# Altium PCB MCU_FOR_DOWNLOAD_V6_8_ROW_PCS.PcbDoc (part 2 of 4)
Units mil, origin at the board's own origin, x right, y up, seen from the top; angles counter-clockwise.
Board outline 2364.06 x 7042.09 mil, 4 copper layers (Top, GND1, GND2, Bottom), stack 35.4 mil thick; 280 components, 38 nets, 1144 pads, 944 vias.
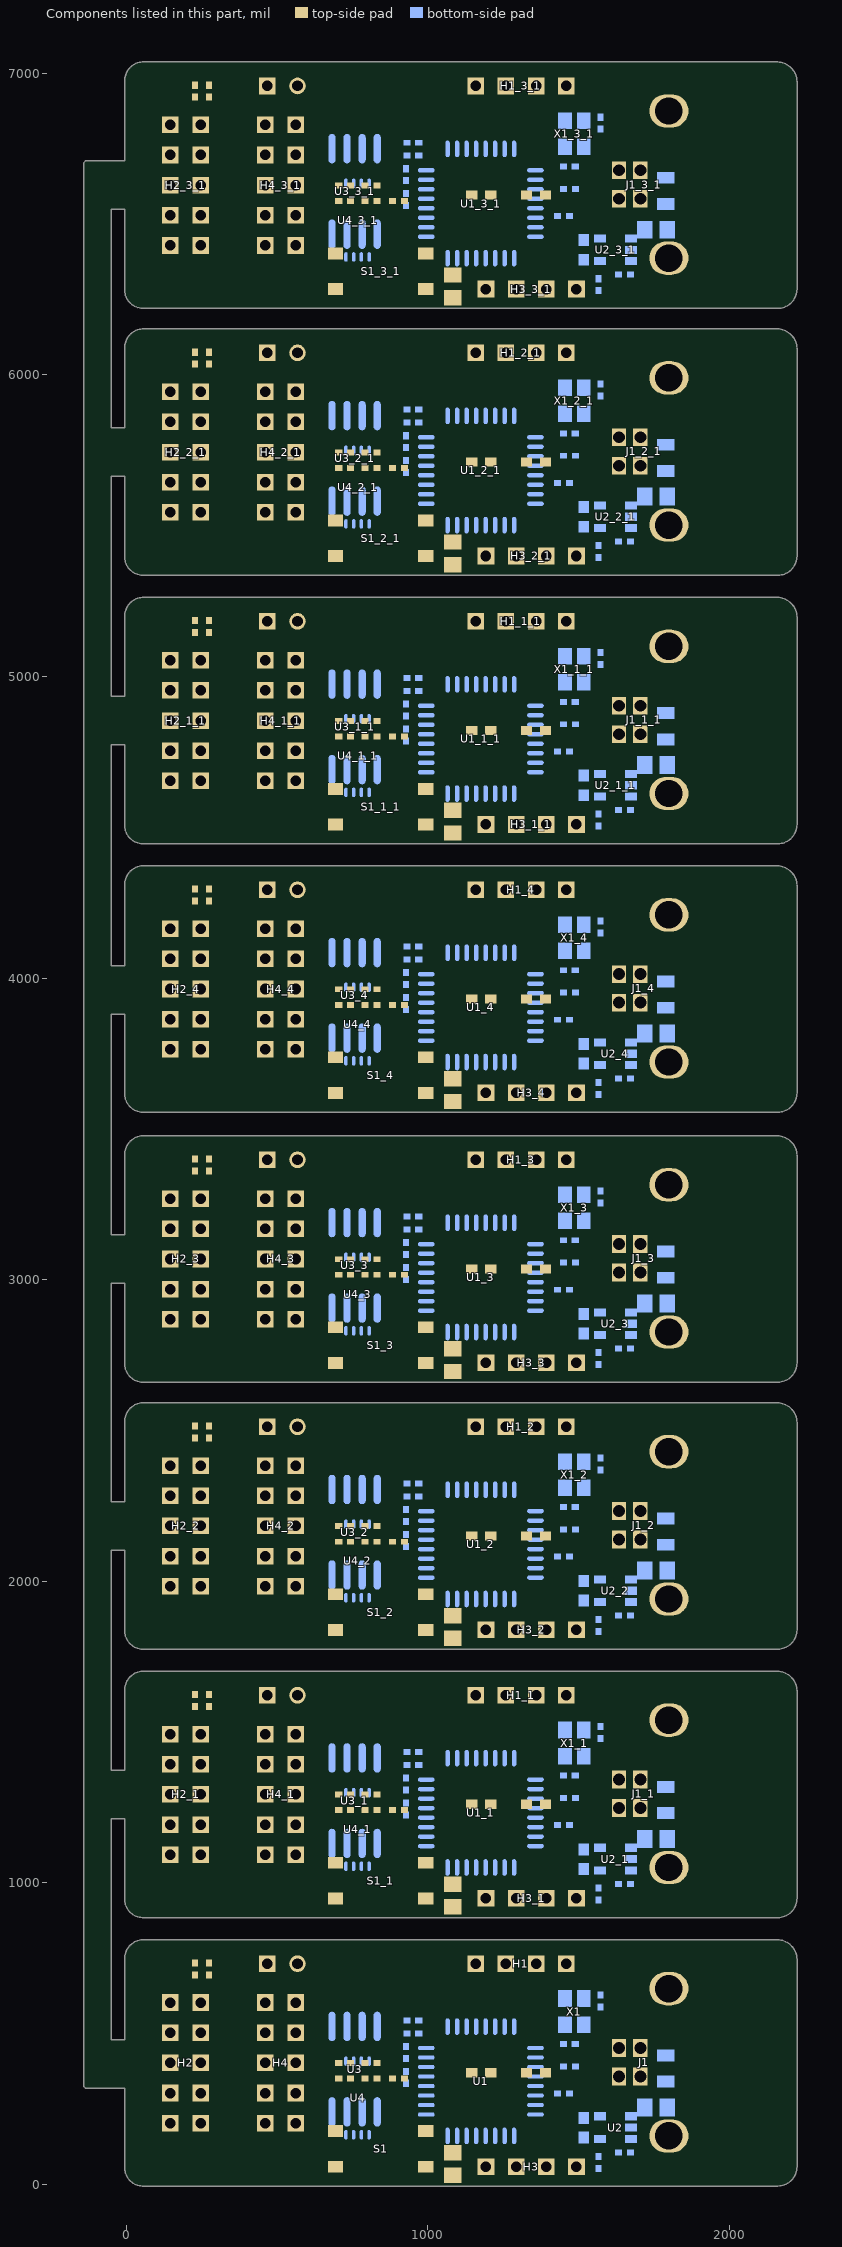
[diagram p2: the components of this part, seen from the top]

## Via types
v1: diameter 16/16/16/16 (per signal layer), hole 8, Top to Bottom, 936 vias
v2: diameter 55/55/55/55 (per signal layer), hole 37, Top to Bottom, 8 vias

## Nets (pads, with @x,y where several pads share a name; then routed paths per layer and width w, separated by ;. In a path a pad name is that pad's centre, name@x,y a point inside that pad or via, vN(x,y) a via of type N, cw(c..) or ccw(c..) an arc to the next point about the centre after c; other vN are vias at no path point) (continued)
copper on no net: | length 208596.2
  Top w7.87: v1(41.34,1641.97) 79.53,1680.16 644.09,1680.16 648.03,1676.22 v1(648.03,1673.07) ; v1(41.34,2531.97) 79.53,2570.16 644.09,2570.16 648.03,2566.22 v1(648.03,2563.07) ; v1(41.34,3416.97) 79.53,3455.16 644.09,3455.16 648.03,3451.22 v1(648.03,3448.07) ; v1(41.34,4311.97) 79.53,4350.16 644.09,4350.16 648.03,4346.22 v1(648.03,4343.07) ; v1(41.34,5201.97) 79.53,5240.16 644.09,5240.16 648.03,5236.22 v1(648.03,5233.07) ; v1(41.34,6091.97) 79.53,6130.16 644.09,6130.16 648.03,6126.22 v1(648.03,6123.07) ; v1(41.34,6976.97) 79.53,7015.16 644.09,7015.16 648.03,7011.22 v1(648.03,7008.07) ; 67.32,1585.28 69.69,1585.28 ; 67.32,2475.28 69.69,2475.28 ; 67.32,3360.28 69.69,3360.28 ; 67.32,4255.28 69.69,4255.28 ; 67.32,5145.28 69.69,5145.28 ; 67.32,6035.28 69.69,6035.28 ; 67.32,6920.28 69.69,6920.28 ; 146.85,1093.54 194.88,1141.57 329.92,1141.57 422.44,1049.06 594.49,1049.06 656.3,1110.87 1048.03,1110.87 v1(1074.41,1084.49) ; 146.85,1193.54 146.85,1194.72 192.52,1240.39 322.34,1240.39 409.45,1153.29 605.02,1153.29 617.32,1140.98 1081.69,1140.98 v1(1127.95,1094.72) ; 146.85,1493.54 149.2,1493.54 203.54,1439.2 203.54,1437.24 292.52,1437.24 314.57,1415.2 314.57,1344.33 425.59,1233.31 597.05,1233.31 674.8,1155.55 1155.71,1155.55 v1(1222.44,1088.82) ; 146.85,1983.54 194.88,2031.57 329.92,2031.57 422.44,1939.06 594.49,1939.06 656.3,2000.87 1048.03,2000.87 v1(1074.41,1974.49) ; 146.85,2083.54 146.85,2084.72 192.52,2130.39 322.34,2130.39 409.45,2043.29 605.02,2043.29 617.32,2030.98 1081.69,2030.98 v1(1127.95,1984.72) ; 146.85,2383.54 149.2,2383.54 203.54,2329.2 203.54,2327.24 292.52,2327.24 314.57,2305.2 314.57,2234.33 425.59,2123.31 597.05,2123.31 674.8,2045.55 1155.71,2045.55 v1(1222.44,1978.82) ; 146.85,2868.54 194.88,2916.57 329.92,2916.57 422.44,2824.06 594.49,2824.06 656.3,2885.87 1048.03,2885.87 v1(1074.41,2859.49) ; 146.85,2968.54 146.85,2969.72 192.52,3015.39 322.34,3015.39 409.45,2928.29 605.02,2928.29 617.32,2915.98 1081.69,2915.98 v1(1127.95,2869.72) ; 146.85,3268.54 149.2,3268.54 203.54,3214.2 203.54,3212.24 292.52,3212.24 314.57,3190.2 314.57,3119.33 425.59,3008.31 597.05,3008.31 674.8,2930.55 1155.71,2930.55 v1(1222.44,2863.82) ; 146.85,3763.54 194.88,3811.57 329.92,3811.57 422.44,3719.06 594.49,3719.06 656.3,3780.87 1048.03,3780.87 v1(1074.41,3754.49) ; 146.85,3863.54 146.85,3864.72 192.52,3910.39 322.34,3910.39 409.45,3823.29 605.02,3823.29 617.32,3810.98 1081.69,3810.98 v1(1127.95,3764.72) ; 146.85,4163.54 149.2,4163.54 203.54,4109.2 203.54,4107.24 292.52,4107.24 314.57,4085.2 314.57,4014.33 425.59,3903.31 597.05,3903.31 674.8,3825.55 1155.71,3825.55 v1(1222.44,3758.82) ; 146.85,4653.54 194.88,4701.57 329.92,4701.57 422.44,4609.06 594.49,4609.06 656.3,4670.87 1048.03,4670.87 v1(1074.41,4644.49) ; 146.85,4753.54 146.85,4754.72 192.52,4800.39 322.34,4800.39 409.45,4713.29 605.02,4713.29 617.32,4700.98 1081.69,4700.98 v1(1127.95,4654.72) ; 146.85,5053.54 149.2,5053.54 203.54,4999.2 203.54,4997.24 292.52,4997.24 314.57,4975.2 314.57,4904.33 425.59,4793.31 597.05,4793.31 674.8,4715.55 1155.71,4715.55 v1(1222.44,4648.82) ; 146.85,5543.54 194.88,5591.57 329.92,5591.57 422.44,5499.06 594.49,5499.06 656.3,5560.87 1048.03,5560.87 v1(1074.41,5534.49) ; 146.85,5643.54 146.85,5644.72 192.52,5690.39 322.34,5690.39 409.45,5603.29 605.02,5603.29 617.32,5590.98 1081.69,5590.98 v1(1127.95,5544.72) ; 146.85,5943.54 149.2,5943.54 203.54,5889.2 203.54,5887.24 292.52,5887.24 314.57,5865.2 314.57,5794.33 425.59,5683.31 597.05,5683.31 674.8,5605.55 1155.71,5605.55 v1(1222.44,5538.82) ; 146.85,6428.54 194.88,6476.57 329.92,6476.57 422.44,6384.06 594.49,6384.06 656.3,6445.87 1048.03,6445.87 v1(1074.41,6419.49) ; 146.85,6528.54 146.85,6529.72 192.52,6575.39 322.34,6575.39 409.45,6488.29 605.02,6488.29 617.32,6475.98 1081.69,6475.98 v1(1127.95,6429.72) ; 146.85,6828.54 149.2,6828.54 203.54,6774.2 203.54,6772.24 292.52,6772.24 314.57,6750.2 314.57,6679.33 425.59,6568.31 597.05,6568.31 674.8,6490.55 1155.71,6490.55 v1(1222.44,6423.82) ; v1(196.85,1054.96) 202.76,1054.96 238.58,1019.13 622.83,1019.13 v1@648.83,1045.13 ; v1(196.85,1944.96) 202.76,1944.96 238.58,1909.13 622.83,1909.13 v1@648.83,1935.13 ; v1(196.85,2829.96) 202.76,2829.96 238.58,2794.13 622.83,2794.13 v1@648.83,2820.13 ; v1(196.85,3724.96) 202.76,3724.96 238.58,3689.13 622.83,3689.13 v1@648.83,3715.13 ; v1(196.85,4614.96) 202.76,4614.96 238.58,4579.13 622.83,4579.13 v1@648.83,4605.13 ; v1(196.85,5504.96) 202.76,5504.96 238.58,5469.13 622.83,5469.13 v1@648.83,5495.13 ; v1(196.85,6389.96) 202.76,6389.96 238.58,6354.13 622.83,6354.13 v1@648.83,6380.13 ; 227.95,1624.65 274.02,1624.65 251.18,1601.81 251.18,1501.02 246.85,1496.69 246.85,1493.54 ; 227.95,2514.65 274.02,2514.65 251.18,2491.81 251.18,2391.02 246.85,2386.69 246.85,2383.54 ; 227.95,3399.65 274.02,3399.65 251.18,3376.81 251.18,3276.02 246.85,3271.69 246.85,3268.54 ; 227.95,4294.65 274.02,4294.65 251.18,4271.81 251.18,4171.02 246.85,4166.69 246.85,4163.54 ; 227.95,5184.65 274.02,5184.65 251.18,5161.81 251.18,5061.02 246.85,5056.69 246.85,5053.54 ; 227.95,6074.65 274.02,6074.65 251.18,6051.81 251.18,5951.02 246.85,5946.69 246.85,5943.54 ; 227.95,6959.65 274.02,6959.65 251.18,6936.81 251.18,6836.02 246.85,6831.69 246.85,6828.54 ; 246.85,1093.54 251.68,1093.54 255.02,1090.2 257.58,1090.2 314.17,1033.6 600.39,1033.6 663.78,1096.99 1025.89,1096.99 1059.65,1063.23 1135.33,1063.23 1156.59,1084.49 1156.99,1084.49 1156.99,1088.33 v1(1159.45,1090.79) ; 246.85,1193.54 327.17,1193.54 327.36,1193.74 385.83,1135.28 599.21,1135.28 609.06,1125.43 1063.78,1125.43 v1(1096.46,1092.76) ; 246.85,1983.54 251.68,1983.54 255.02,1980.2 257.58,1980.2 314.17,1923.6 600.39,1923.6 663.78,1986.99 1025.89,1986.99 1059.65,1953.23 1135.33,1953.23 1156.59,1974.49 1156.99,1974.49 1156.99,1978.33 v1(1159.45,1980.79) ; 246.85,2083.54 327.17,2083.54 327.36,2083.74 385.83,2025.28 599.21,2025.28 609.06,2015.43 1063.78,2015.43 v1(1096.46,1982.76) ; 246.85,2868.54 251.68,2868.54 255.02,2865.2 257.58,2865.2 314.17,2808.6 600.39,2808.6 663.78,2871.99 1025.89,2871.99 1059.65,2838.23 1135.33,2838.23 1156.59,2859.49 1156.99,2859.49 1156.99,2863.33 v1(1159.45,2865.79) ; 246.85,2968.54 327.17,2968.54 327.36,2968.74 385.83,2910.28 599.21,2910.28 609.06,2900.43 1063.78,2900.43 v1(1096.46,2867.76) ; 246.85,3763.54 251.68,3763.54 255.02,3760.2 257.58,3760.2 314.17,3703.6 600.39,3703.6 663.78,3766.99 1025.89,3766.99 1059.65,3733.23 1135.33,3733.23 1156.59,3754.49 1156.99,3754.49 1156.99,3758.33 v1(1159.45,3760.79) ; 246.85,3863.54 327.17,3863.54 327.36,3863.74 385.83,3805.28 599.21,3805.28 609.06,3795.43 1063.78,3795.43 v1(1096.46,3762.76) ; 246.85,4653.54 251.68,4653.54 255.02,4650.2 257.58,4650.2 314.17,4593.6 600.39,4593.6 663.78,4656.99 1025.89,4656.99 1059.65,4623.23 1135.33,4623.23 1156.59,4644.49 1156.99,4644.49 1156.99,4648.33 v1(1159.45,4650.79) ; 246.85,4753.54 327.17,4753.54 327.36,4753.74 385.83,4695.28 599.21,4695.28 609.06,4685.43 1063.78,4685.43 v1(1096.46,4652.76) ; 246.85,5543.54 251.68,5543.54 255.02,5540.2 257.58,5540.2 314.17,5483.6 600.39,5483.6 663.78,5546.99 1025.89,5546.99 1059.65,5513.23 1135.33,5513.23 1156.59,5534.49 1156.99,5534.49 1156.99,5538.33 v1(1159.45,5540.79) ; 246.85,5643.54 327.17,5643.54 327.36,5643.74 385.83,5585.28 599.21,5585.28 609.06,5575.43 1063.78,5575.43 v1(1096.46,5542.76) ; 246.85,6428.54 251.68,6428.54 255.02,6425.2 257.58,6425.2 314.17,6368.6 600.39,6368.6 663.78,6431.99 1025.89,6431.99 1059.65,6398.23 1135.33,6398.23 1156.59,6419.49 1156.99,6419.49 1156.99,6423.33 v1(1159.45,6425.79) ; 246.85,6528.54 327.17,6528.54 327.36,6528.74 385.83,6470.28 599.21,6470.28 609.06,6460.43 1063.78,6460.43 v1(1096.46,6427.76) ; 274.02,1585.28 316.14,1585.28 381.89,1519.53 381.89,1374.25 411.42,1344.72 v1(600.39,1344.72) 701.97,1243.15 701.97,1241.18 701.97,1232.52 706.5,1227.99 ; 274.02,2475.28 316.14,2475.28 381.89,2409.53 381.89,2264.25 411.42,2234.72 v1(600.39,2234.72) 701.97,2133.15 701.97,2131.18 701.97,2122.52 706.5,2117.99 ; 274.02,3360.28 316.14,3360.28 381.89,3294.53 381.89,3149.25 411.42,3119.72 v1(600.39,3119.72) 701.97,3018.15 701.97,3016.18 701.97,3007.52 706.5,3002.99 ; 274.02,4255.28 316.14,4255.28 381.89,4189.53 381.89,4044.25 411.42,4014.72 v1(600.39,4014.72) 701.97,3913.15 701.97,3911.18 701.97,3902.52 706.5,3897.99 ; 274.02,5145.28 316.14,5145.28 381.89,5079.53 381.89,4934.25 411.42,4904.72 v1(600.39,4904.72) 701.97,4803.15 701.97,4801.18 701.97,4792.52 706.5,4787.99 ; 274.02,6035.28 316.14,6035.28 381.89,5969.53 381.89,5824.25 411.42,5794.72 v1(600.39,5794.72) 701.97,5693.15 701.97,5691.18 701.97,5682.52 706.5,5677.99 ; 274.02,6920.28 316.14,6920.28 381.89,6854.53 381.89,6709.25 411.42,6679.72 v1(600.39,6679.72) 701.97,6578.15 701.97,6576.18 701.97,6567.52 706.5,6562.99 ; 461.81,1493.54 460.63,1493.54 458.27,1491.18 458.86,1490.59 497.24,1452.2 759.45,1452.2 826.77,1384.88 869.29,1384.88 v1(872.05,1382.13) ; 461.81,2383.54 460.63,2383.54 458.27,2381.18 458.86,2380.59 497.24,2342.2 759.45,2342.2 826.77,2274.88 869.29,2274.88 v1(872.05,2272.13) ; 461.81,3268.54 460.63,3268.54 458.27,3266.18 458.86,3265.59 497.24,3227.2 759.45,3227.2 826.77,3159.88 869.29,3159.88 v1(872.05,3157.13) ; 461.81,4163.54 460.63,4163.54 458.27,4161.18 458.86,4160.59 497.24,4122.2 759.45,4122.2 826.77,4054.88 869.29,4054.88 v1(872.05,4052.13) ; 461.81,5053.54 460.63,5053.54 458.27,5051.18 458.86,5050.59 497.24,5012.2 759.45,5012.2 826.77,4944.88 869.29,4944.88 v1(872.05,4942.13) ; 461.81,5943.54 460.63,5943.54 458.27,5941.18 458.86,5940.59 497.24,5902.2 759.45,5902.2 826.77,5834.88 869.29,5834.88 v1(872.05,5832.13) ; 461.81,6828.54 460.63,6828.54 458.27,6826.18 458.86,6825.59 497.24,6787.2 759.45,6787.2 826.77,6719.88 869.29,6719.88 v1(872.05,6717.13) ; v1(692.91,1187.24) 693.31,1187.24 710.63,1169.92 1176.77,1169.92 v1(1185.04,1161.65) ; v1(692.91,1360.47) v1(1149.61,1360.47) ; v1(692.91,2077.24) 693.31,2077.24 710.63,2059.92 1176.77,2059.92 v1(1185.04,2051.65) ; v1(692.91,2250.47) v1(1149.61,2250.47) ; v1(692.91,2962.24) 693.31,2962.24 710.63,2944.92 1176.77,2944.92 v1(1185.04,2936.65) ; v1(692.91,3135.47) v1(1149.61,3135.47) ; v1(692.91,3857.24) 693.31,3857.24 710.63,3839.92 1176.77,3839.92 v1(1185.04,3831.65) ; v1(692.91,4030.47) v1(1149.61,4030.47) ; v1(692.91,4747.24) 693.31,4747.24 710.63,4729.92 1176.77,4729.92 v1(1185.04,4721.65) ; v1(692.91,4920.47) v1(1149.61,4920.47) ; v1(692.91,5637.24) 693.31,5637.24 710.63,5619.92 1176.77,5619.92 v1(1185.04,5611.65) ; v1(692.91,5810.47) v1(1149.61,5810.47) ; v1(692.91,6522.24) 693.31,6522.24 710.63,6504.92 1176.77,6504.92 v1(1185.04,6496.65) ; v1(692.91,6695.47) v1(1149.61,6695.47) ; 704.72,1241.18 706.5,1239.41 706.5,1227.99 ; 704.72,1292.76 704.72,1320.31 725.2,1340.79 874.8,1340.79 ; 704.72,2131.18 706.5,2129.41 706.5,2117.99 ; 704.72,2182.76 704.72,2210.31 725.2,2230.79 874.8,2230.79 ; 704.72,3016.18 706.5,3014.41 706.5,3002.99 ; 704.72,3067.76 704.72,3095.31 725.2,3115.79 874.8,3115.79 ; 704.72,3911.18 706.5,3909.41 706.5,3897.99 ; 704.72,3962.76 704.72,3990.31 725.2,4010.79 874.8,4010.79 ; 704.72,4801.18 706.5,4799.41 706.5,4787.99 ; 704.72,4852.76 704.72,4880.31 725.2,4900.79 874.8,4900.79 ; 704.72,5691.18 706.5,5689.41 706.5,5677.99 ; 704.72,5742.76 704.72,5770.31 725.2,5790.79 874.8,5790.79 ; 704.72,6576.18 706.5,6574.41 706.5,6562.99 ; 704.72,6627.76 704.72,6655.31 725.2,6675.79 874.8,6675.79 ; 744.09,1241.18 744.09,1292.76 744.09,1313.62 751.18,1320.71 753.54,1320.71 v1(753.94,1321.1) ; 744.09,2131.18 744.09,2182.76 744.09,2203.62 751.18,2210.71 753.54,2210.71 v1(753.94,2211.1) ; 744.09,3016.18 744.09,3067.76 744.09,3088.62 751.18,3095.71 753.54,3095.71 v1(753.94,3096.1) ; 744.09,3911.18 744.09,3962.76 744.09,3983.62 751.18,3990.71 753.54,3990.71 v1(753.94,3991.1) ; 744.09,4801.18 744.09,4852.76 744.09,4873.62 751.18,4880.71 753.54,4880.71 v1(753.94,4881.1) ; 744.09,5691.18 744.09,5742.76 744.09,5763.62 751.18,5770.71 753.54,5770.71 v1(753.94,5771.1) ; 744.09,6576.18 744.09,6627.76 744.09,6648.62 751.18,6655.71 753.54,6655.71 v1(753.94,6656.1) ; v1(783.46,1321.1) 803.15,1321.1 831.5,1292.76 ; v1(783.46,2211.1) 803.15,2211.1 831.5,2182.76 ; v1(783.46,3096.1) 803.15,3096.1 831.5,3067.76 ; v1(783.46,3991.1) 803.15,3991.1 831.5,3962.76 ; v1(783.46,4881.1) 803.15,4881.1 831.5,4852.76 ; v1(783.46,5771.1) 803.15,5771.1 831.5,5742.76 ; v1(783.46,6656.1) 803.15,6656.1 831.5,6627.76 ; v1(791.34,1210.87) 795.67,1206.54 795.67,1206.34 1225.2,1206.34 1261.42,1242.56 1261.42,1295.12 v1(1309.06,1342.76) ; v1(791.34,2100.87) 795.67,2096.54 795.67,2096.34 1225.2,2096.34 1261.42,2132.56 1261.42,2185.12 v1(1309.06,2232.76) ; v1(791.34,2985.87) 795.67,2981.54 795.67,2981.34 1225.2,2981.34 1261.42,3017.56 1261.42,3070.12 v1(1309.06,3117.76) ; v1(791.34,3880.87) 795.67,3876.54 795.67,3876.34 1225.2,3876.34 1261.42,3912.56 1261.42,3965.12 v1(1309.06,4012.76) ; v1(791.34,4770.87) 795.67,4766.54 795.67,4766.34 1225.2,4766.34 1261.42,4802.56 1261.42,4855.12 v1(1309.06,4902.76) ; v1(791.34,5660.87) 795.67,5656.54 795.67,5656.34 1225.2,5656.34 1261.42,5692.56 1261.42,5745.12 v1(1309.06,5792.76) ; v1(791.34,6545.87) 795.67,6541.54 795.67,6541.34 1225.2,6541.34 1261.42,6577.56 1261.42,6630.12 v1(1309.06,6677.76) ; 792.13,1241.18 792.13,1242.76 828.74,1279.37 828.74,1291.22 829.12,1291.59 829.12,1291.95 ; 792.13,1292.76 790.55,1292.76 767.5,1269.7 767.5,1240.79 767.13,1191.57 766.54,1188.43 ; 792.13,2131.18 792.13,2132.76 828.74,2169.37 828.74,2181.22 829.12,2181.59 829.12,2181.95 ; 792.13,2182.76 790.55,2182.76 767.5,2159.7 767.5,2130.79 767.13,2081.57 766.54,2078.43 ; 792.13,3016.18 792.13,3017.76 828.74,3054.37 828.74,3066.22 829.12,3066.59 829.12,3066.95 ; 792.13,3067.76 790.55,3067.76 767.5,3044.7 767.5,3015.79 767.13,2966.57 766.54,2963.43 ; 792.13,3911.18 792.13,3912.76 828.74,3949.37 828.74,3961.22 829.12,3961.59 829.12,3961.95 ; 792.13,3962.76 790.55,3962.76 767.5,3939.7 767.5,3910.79 767.13,3861.57 766.54,3858.43 ; 792.13,4801.18 792.13,4802.76 828.74,4839.37 828.74,4851.22 829.12,4851.59 829.12,4851.95 ; 792.13,4852.76 790.55,4852.76 767.5,4829.7 767.5,4800.79 767.13,4751.57 766.54,4748.43 ; 792.13,5691.18 792.13,5692.76 828.74,5729.37 828.74,5741.22 829.12,5741.59 829.12,5741.95 ; 792.13,5742.76 790.55,5742.76 767.5,5719.7 767.5,5690.79 767.13,5641.57 766.54,5638.43 ; 792.13,6576.18 792.13,6577.76 828.74,6614.37 828.74,6626.22 829.12,6626.59 829.12,6626.95 ; 792.13,6627.76 790.55,6627.76 767.5,6604.7 767.5,6575.79 767.13,6526.57 766.54,6523.43 ; 831.5,1241.18 832.28,1240.39 832.28,1238.03 838.39,1231.93 838.39,1230.75 v1(844.49,1224.65) ; 831.5,2131.18 832.28,2130.39 832.28,2128.03 838.39,2121.93 838.39,2120.75 v1(844.49,2114.65) ; 831.5,3016.18 832.28,3015.39 832.28,3013.03 838.39,3006.93 838.39,3005.75 v1(844.49,2999.65) ; 831.5,3911.18 832.28,3910.39 832.28,3908.03 838.39,3901.93 838.39,3900.75 v1(844.49,3894.65) ; 831.5,4801.18 832.28,4800.39 832.28,4798.03 838.39,4791.93 838.39,4790.75 v1(844.49,4784.65) ; 831.5,5691.18 832.28,5690.39 832.28,5688.03 838.39,5681.93 838.39,5680.75 v1(844.49,5674.65) ; 831.5,6576.18 832.28,6575.39 832.28,6573.03 838.39,6566.93 838.39,6565.75 v1(844.49,6559.65) ; 874.8,1241.57 874.8,1340.79 ; 874.8,2131.57 874.8,2230.79 ; 874.8,3016.57 874.8,3115.79 ; 874.8,3911.57 874.8,4010.79 ; 874.8,4801.57 874.8,4900.79 ; 874.8,5691.57 874.8,5790.79 ; 874.8,6576.57 874.8,6675.79 ; v1(893.7,1269.92) 922.44,1241.18 ; v1(893.7,2159.92) 922.44,2131.18 ; v1(893.7,3044.92) 922.44,3016.18 ; v1(893.7,3939.92) 922.44,3911.18 ; v1(893.7,4829.92) 922.44,4801.18 ; v1(893.7,5719.92) 922.44,5691.18 ; v1(893.7,6604.92) 922.44,6576.18 ; v1(944.88,1069.13) 991.34,1069.13 993.31,1067.17 ; v1(944.88,1959.13) 991.34,1959.13 993.31,1957.17 ; v1(944.88,2844.13) 991.34,2844.13 993.31,2842.17 ; v1(944.88,3739.13) 991.34,3739.13 993.31,3737.17 ; v1(944.88,4629.13) 991.34,4629.13 993.31,4627.17 ; v1(944.88,5519.13) 991.34,5519.13 993.31,5517.17 ; v1(944.88,6404.13) 991.34,6404.13 993.31,6402.17 ; v1(948.82,1265.98) 1143.31,1265.98 1146.17,1263.13 1146.17,1260.87 ; v1(948.82,2155.98) 1143.31,2155.98 1146.17,2153.13 1146.17,2150.87 ; v1(948.82,3040.98) 1143.31,3040.98 1146.17,3038.13 1146.17,3035.87 ; v1(948.82,3935.98) 1143.31,3935.98 1146.17,3933.13 1146.17,3930.87 ; v1(948.82,4825.98) 1143.31,4825.98 1146.17,4823.13 1146.17,4820.87 ; v1(948.82,5715.98) 1143.31,5715.98 1146.17,5713.13 1146.17,5710.87 ; v1(948.82,6600.98) 1143.31,6600.98 1146.17,6598.13 1146.17,6595.87 ; v1(1191.73,1378.98) 1192.52,1378.19 1192.52,1372.68 1160.63,1340.79 874.8,1340.79 ; v1(1191.73,2268.98) 1192.52,2268.19 1192.52,2262.68 1160.63,2230.79 874.8,2230.79 ; v1(1191.73,3153.98) 1192.52,3153.19 1192.52,3147.68 1160.63,3115.79 874.8,3115.79 ; v1(1191.73,4048.98) 1192.52,4048.19 1192.52,4042.68 1160.63,4010.79 874.8,4010.79 ; v1(1191.73,4938.98) 1192.52,4938.19 1192.52,4932.68 1160.63,4900.79 874.8,4900.79 ; v1(1191.73,5828.98) 1192.52,5828.19 1192.52,5822.68 1160.63,5790.79 874.8,5790.79 ; v1(1191.73,6713.98) 1192.52,6713.19 1192.52,6707.68 1160.63,6675.79 874.8,6675.79 ; v1(1222.44,1122.28) 1223.62,1123.46 1283.86,1123.46 1309.65,1097.68 1583.27,1097.68 1639.76,1041.18 1640.16,1041.57 v1(1702.76,1041.57) ; v1(1222.44,2012.28) 1223.62,2013.46 1283.86,2013.46 1309.65,1987.68 1583.27,1987.68 1639.76,1931.18 1640.16,1931.57 v1(1702.76,1931.57) ; v1(1222.44,2897.28) 1223.62,2898.46 1283.86,2898.46 1309.65,2872.68 1583.27,2872.68 1639.76,2816.18 1640.16,2816.57 v1(1702.76,2816.57) ; v1(1222.44,3792.28) 1223.62,3793.46 1283.86,3793.46 1309.65,3767.68 1583.27,3767.68 1639.76,3711.18 1640.16,3711.57 v1(1702.76,3711.57) ; v1(1222.44,4682.28) 1223.62,4683.46 1283.86,4683.46 1309.65,4657.68 1583.27,4657.68 1639.76,4601.18 1640.16,4601.57 v1(1702.76,4601.57) ; v1(1222.44,5572.28) 1223.62,5573.46 1283.86,5573.46 1309.65,5547.68 1583.27,5547.68 1639.76,5491.18 1640.16,5491.57 v1(1702.76,5491.57) ; v1(1222.44,6457.28) 1223.62,6458.46 1283.86,6458.46 1309.65,6432.68 1583.27,6432.68 1639.76,6376.18 1640.16,6376.57 v1(1702.76,6376.57) ; v1(1263.78,1096.69) 1263.39,1082.13 1218.9,1037.64 v1(944.88,1037.64) 660.24,1037.64 649.21,1044.89 v1@648.83,1045.13 ; v1(1263.78,1986.69) 1263.39,1972.13 1218.9,1927.64 v1(944.88,1927.64) 660.24,1927.64 649.21,1934.89 v1@648.83,1935.13 ; v1(1263.78,2871.69) 1263.39,2857.13 1218.9,2812.64 v1(944.88,2812.64) 660.24,2812.64 649.21,2819.89 v1@648.83,2820.13 ; v1(1263.78,3766.69) 1263.39,3752.13 1218.9,3707.64 v1(944.88,3707.64) 660.24,3707.64 649.21,3714.89 v1@648.83,3715.13 ; v1(1263.78,4656.69) 1263.39,4642.13 1218.9,4597.64 v1(944.88,4597.64) 660.24,4597.64 649.21,4604.89 v1@648.83,4605.13 ; v1(1263.78,5546.69) 1263.39,5532.13 1218.9,5487.64 v1(944.88,5487.64) 660.24,5487.64 649.21,5494.89 v1@648.83,5495.13 ; v1(1263.78,6431.69) 1263.39,6417.13 1218.9,6372.64 v1(944.88,6372.64) 660.24,6372.64 649.21,6379.89 v1@648.83,6380.13 ; v1(1311.02,1311.26) 1309.45,1312.83 1305.12,1312.83 1301.77,1309.49 1300.98,1309.49 1280.51,1289.02 1280.51,1216.57 1252.36,1188.43 766.54,1188.43 ; v1(1311.02,2201.26) 1309.45,2202.83 1305.12,2202.83 1301.77,2199.49 1300.98,2199.49 1280.51,2179.02 1280.51,2106.57 1252.36,2078.43 766.54,2078.43 ; v1(1311.02,3086.26) 1309.45,3087.83 1305.12,3087.83 1301.77,3084.49 1300.98,3084.49 1280.51,3064.02 1280.51,2991.57 1252.36,2963.43 766.54,2963.43 ; v1(1311.02,3981.26) 1309.45,3982.83 1305.12,3982.83 1301.77,3979.49 1300.98,3979.49 1280.51,3959.02 1280.51,3886.57 1252.36,3858.43 766.54,3858.43 ; v1(1311.02,4871.26) 1309.45,4872.83 1305.12,4872.83 1301.77,4869.49 1300.98,4869.49 1280.51,4849.02 1280.51,4776.57 1252.36,4748.43 766.54,4748.43 ; v1(1311.02,5761.26) 1309.45,5762.83 1305.12,5762.83 1301.77,5759.49 1300.98,5759.49 1280.51,5739.02 1280.51,5666.57 1252.36,5638.43 766.54,5638.43 ; v1(1311.02,6646.26) 1309.45,6647.83 1305.12,6647.83 1301.77,6644.49 1300.98,6644.49 1280.51,6624.02 1280.51,6551.57 1252.36,6523.43 766.54,6523.43 ; v1(1322.83,1286.06) 1327.27,1281.63 1327.27,1260.87 ; v1(1322.83,2176.06) 1327.27,2171.63 1327.27,2150.87 ; v1(1322.83,3061.06) 1327.27,3056.63 1327.27,3035.87 ; v1(1322.83,3956.06) 1327.27,3951.63 1327.27,3930.87 ; v1(1322.83,4846.06) 1327.27,4841.63 1327.27,4820.87 ; v1(1322.83,5736.06) 1327.27,5731.63 1327.27,5710.87 ; v1(1322.83,6621.06) 1327.27,6616.63 1327.27,6595.87 ; 1390.26,1260.87 1390.26,1262.44 1405.91,1262.44 v1(1425.2,1281.73) ; 1390.26,2150.87 1390.26,2152.44 1405.91,2152.44 v1(1425.2,2171.73) ; 1390.26,3035.87 1390.26,3037.44 1405.91,3037.44 v1(1425.2,3056.73) ; 1390.26,3930.87 1390.26,3932.44 1405.91,3932.44 v1(1425.2,3951.73) ; 1390.26,4820.87 1390.26,4822.44 1405.91,4822.44 v1(1425.2,4841.73) ; 1390.26,5710.87 1390.26,5712.44 1405.91,5712.44 v1(1425.2,5731.73) ; 1390.26,6595.87 1390.26,6597.44 1405.91,6597.44 v1(1425.2,6616.73) ; v1@648.83,1045.13 646.46,1046.69 v1(650.39,1046.69) v1@648.83,1045.13 ; v1@648.83,1935.13 646.46,1936.69 v1(650.39,1936.69) v1@648.83,1935.13 ; v1@648.83,2820.13 646.46,2821.69 v1(650.39,2821.69) v1@648.83,2820.13 ; v1@648.83,3715.13 646.46,3716.69 v1(650.39,3716.69) v1@648.83,3715.13 ; v1@648.83,4605.13 v1(650.39,4606.69) 646.46,4606.69 v1@648.83,4605.13 ; v1@648.83,5495.13 v1(650.39,5496.69) 646.46,5496.69 v1@648.83,5495.13 ; v1@648.83,6380.13 v1(650.39,6381.69) 646.46,6381.69 v1@648.83,6380.13 ; 706.5,1227.99 743.5,1190.98 746.06,1188.43 766.54,1188.43 ; 706.5,2117.99 743.5,2080.98 746.06,2078.43 766.54,2078.43 ; 706.5,3002.99 743.5,2965.98 746.06,2963.43 766.54,2963.43 ; 706.5,3897.99 743.5,3860.98 746.06,3858.43 766.54,3858.43 ; 706.5,4787.99 743.5,4750.98 746.06,4748.43 766.54,4748.43 ; 706.5,5677.99 743.5,5640.98 746.06,5638.43 766.54,5638.43 ; 706.5,6562.99 743.5,6525.98 746.06,6523.43 766.54,6523.43
  Top w11.81: 69.69,1585.28 227.95,1585.28 ; 69.69,2475.28 227.95,2475.28 ; 69.69,3360.28 227.95,3360.28 ; 69.69,4255.28 227.95,4255.28 ; 69.69,5145.28 227.95,5145.28 ; 69.69,6035.28 227.95,6035.28 ; 69.69,6920.28 227.95,6920.28
  Top w19.68: 694.09,1067.17 944.88,1067.17 993.31,1067.17 ; 694.09,1957.17 944.88,1957.17 993.31,1957.17 ; 694.09,2842.17 944.88,2842.17 993.31,2842.17 ; 694.09,3737.17 944.88,3737.17 993.31,3737.17 ; 694.09,4627.17 944.88,4627.17 993.31,4627.17 ; 694.09,5517.17 944.88,5517.17 993.31,5517.17 ; 694.09,6402.17 944.88,6402.17 993.31,6402.17 ; 1083.07,920.63 1083.94,921.5 v1(1137.8,921.5) ; 1083.07,1810.63 1083.94,1811.5 v1(1137.8,1811.5) ; 1083.07,2695.63 1083.94,2696.5 v1(1137.8,2696.5) ; 1083.07,3590.63 1083.94,3591.5 v1(1137.8,3591.5) ; 1083.07,4480.63 1083.94,4481.5 v1(1137.8,4481.5) ; 1083.07,5370.63 1083.94,5371.5 v1(1137.8,5371.5) ; 1083.07,6255.63 1083.94,6256.5 v1(1137.8,6256.5)
  Top w22.05: v1(1035.43,909.69) 1072.13,909.69 1078.39,915.95 1083.07,920.63 ; v1(1035.43,1799.69) 1072.13,1799.69 1078.39,1805.95 1083.07,1810.63 ; v1(1035.43,2684.69) 1072.13,2684.69 1078.39,2690.95 1083.07,2695.63 ; v1(1035.43,3579.69) 1072.13,3579.69 1078.39,3585.95 1083.07,3590.63 ; v1(1035.43,4469.69) 1072.13,4469.69 1078.39,4475.95 1083.07,4480.63 ; v1(1035.43,5359.69) 1072.13,5359.69 1078.39,5365.95 1083.07,5370.63 ; v1(1035.43,6244.69) 1072.13,6244.69 1078.39,6250.95 1083.07,6255.63
  Top w23.62: 246.85,1393.54 246,1392.69 246,1386.61 205.51,1346.12 205.51,1344.72 67.32,1344.72 ; 246.85,2283.54 246,2282.69 246,2276.61 205.51,2236.12 205.51,2234.72 67.32,2234.72 ; 246.85,3168.54 246,3167.69 246,3161.61 205.51,3121.12 205.51,3119.72 67.32,3119.72 ; 246.85,4063.54 246,4062.69 246,4056.61 205.51,4016.12 205.51,4014.72 67.32,4014.72 ; 246.85,4953.54 246,4952.69 246,4946.61 205.51,4906.12 205.51,4904.72 67.32,4904.72 ; 246.85,5843.54 246,5842.69 246,5836.61 205.51,5796.12 205.51,5794.72 67.32,5794.72 ; 246.85,6728.54 246,6727.69 246,6721.61 205.51,6681.12 205.51,6679.72 67.32,6679.72 ; 468.11,1622.28 468.11,1623.46 436.61,1654.96 125.2,1654.96 67.32,1597.09 67.32,1585.28 67.32,1344.72 ; 468.11,2512.28 468.11,2513.46 436.61,2544.96 125.2,2544.96 67.32,2487.09 67.32,2475.28 67.32,2234.72 ; 468.11,3397.28 468.11,3398.46 436.61,3429.96 125.2,3429.96 67.32,3372.09 67.32,3360.28 67.32,3119.72 ; 468.11,4292.28 468.11,4293.46 436.61,4324.96 125.2,4324.96 67.32,4267.09 67.32,4255.28 67.32,4014.72 ; 468.11,5182.28 468.11,5183.46 436.61,5214.96 125.2,5214.96 67.32,5157.09 67.32,5145.28 67.32,4904.72 ; 468.11,6072.28 468.11,6073.46 436.61,6104.96 125.2,6104.96 67.32,6047.09 67.32,6035.28 67.32,5794.72 ; 468.11,6957.28 468.11,6958.46 436.61,6989.96 125.2,6989.96 67.32,6932.09 67.32,6920.28 67.32,6679.72 ; 568.11,1622.28 589.17,1601.22 589.57,1601.22 605.12,1585.67 1066.54,1585.67 1231.1,1421.1 1231.1,1384.88 ; 568.11,2512.28 589.17,2491.22 589.57,2491.22 605.12,2475.67 1066.54,2475.67 1231.1,2311.1 1231.1,2274.88 ; 568.11,3397.28 589.17,3376.22 589.57,3376.22 605.12,3360.67 1066.54,3360.67 1231.1,3196.1 1231.1,3159.88 ; 568.11,4292.28 589.17,4271.22 589.57,4271.22 605.12,4255.67 1066.54,4255.67 1231.1,4091.1 1231.1,4054.88 ; 568.11,5182.28 589.17,5161.22 589.57,5161.22 605.12,5145.67 1066.54,5145.67 1231.1,4981.1 1231.1,4944.88 ; 568.11,6072.28 589.17,6051.22 589.57,6051.22 605.12,6035.67 1066.54,6035.67 1231.1,5871.1 1231.1,5834.88 ; 568.11,6957.28 589.17,6936.22 589.57,6936.22 605.12,6920.67 1066.54,6920.67 1231.1,6756.1 1231.1,6719.88 ; 1083.07,995.59 1074.49,1004.17 662.2,1004.17 639.37,981.34 125.2,981.34 67.32,1039.21 67.32,1344.72 ; 1083.07,1885.59 1074.49,1894.17 662.2,1894.17 639.37,1871.34 125.2,1871.34 67.32,1929.21 67.32,2234.72 ; 1083.07,2770.59 1074.49,2779.17 662.2,2779.17 639.37,2756.34 125.2,2756.34 67.32,2814.21 67.32,3119.72 ; 1083.07,3665.59 1074.49,3674.17 662.2,3674.17 639.37,3651.34 125.2,3651.34 67.32,3709.21 67.32,4014.72 ; 1083.07,4555.59 1074.49,4564.17 662.2,4564.17 639.37,4541.34 125.2,4541.34 67.32,4599.21 67.32,4904.72 ; 1083.07,5445.59 1074.49,5454.17 662.2,5454.17 639.37,5431.34 125.2,5431.34 67.32,5489.21 67.32,5794.72 ; 1083.07,6330.59 1074.49,6339.17 662.2,6339.17 639.37,6316.34 125.2,6316.34 67.32,6374.21 67.32,6679.72 ; 1209.16,1260.87 1231.1,1282.81 1231.1,1384.88 ; 1209.16,2150.87 1231.1,2172.81 1231.1,2274.88 ; 1209.16,3035.87 1231.1,3057.81 1231.1,3159.88 ; 1209.16,3930.87 1231.1,3952.81 1231.1,4054.88 ; 1209.16,4820.87 1231.1,4842.81 1231.1,4944.88 ; 1209.16,5710.87 1231.1,5732.81 1231.1,5834.88 ; 1209.16,6595.87 1231.1,6617.81 1231.1,6719.88 ; v1(1397.64,1185.28) 1490.94,1278.58 v1@1518.9,1278.58 ; v1(1397.64,2075.28) 1490.94,2168.58 v1@1518.9,2168.58 ; v1(1397.64,2960.28) 1490.94,3053.58 v1@1518.9,3053.58 ; v1(1397.64,3855.28) 1490.94,3948.58 v1@1518.9,3948.58 ; v1(1397.64,4745.28) 1490.94,4838.58 v1@1518.9,4838.58 ; v1(1397.64,5635.28) 1490.94,5728.58 v1@1518.9,5728.58 ; v1(1397.64,6520.28) 1490.94,6613.58 v1@1518.9,6613.58 ; v1(1519.69,1277.8) v1@1518.9,1278.58 ; v1(1519.69,2167.8) v1@1518.9,2168.58 ; v1(1519.69,3052.8) v1@1518.9,3053.58 ; v1(1519.69,3947.8) v1@1518.9,3948.58 ; v1(1519.69,4837.8) v1@1518.9,4838.58 ; v1(1519.69,5727.8) v1@1518.9,5728.58 ; v1(1519.69,6612.8) v1@1518.9,6613.58 ; 1231.1,1384.88 1412.6,1384.88 v1@1518.9,1278.58 ; 1231.1,2274.88 1412.6,2274.88 v1@1518.9,2168.58 ; 1231.1,3159.88 1412.6,3159.88 v1@1518.9,3053.58 ; 1231.1,4054.88 1412.6,4054.88 v1@1518.9,3948.58 ; 1231.1,4944.88 1412.6,4944.88 v1@1518.9,4838.58 ; 1231.1,5834.88 1412.6,5834.88 v1@1518.9,5728.58 ; 1231.1,6719.88 1412.6,6719.88 v1@1518.9,6613.58
  Top w31.5: 1083.07,995.59 1095.2,1007.72 1283.86,1007.72 1333.46,1056.54 v2(1348.03,1056.54) ; 1083.07,1885.59 1095.2,1897.72 1283.86,1897.72 1333.46,1946.54 v2(1348.03,1946.54) ; 1083.07,2770.59 1095.2,2782.72 1283.86,2782.72 1333.46,2831.54 v2(1348.03,2831.54) ; 1083.07,3665.59 1095.2,3677.72 1283.86,3677.72 1333.46,3726.54 v2(1348.03,3726.54) ; 1083.07,4555.59 1095.2,4567.72 1283.86,4567.72 1333.46,4616.54 v2(1348.03,4616.54) ; 1083.07,5445.59 1095.2,5457.72 1283.86,5457.72 1333.46,5506.54 v2(1348.03,5506.54) ; 1083.07,6330.59 1095.2,6342.72 1283.86,6342.72 1333.46,6391.54 v2(1348.03,6391.54)